# Altium PCB PCB1.PcbDoc
Units mm, origin at the board's own origin, x right, y up, seen from the top; angles counter-clockwise.
Board outline 46.35 x 40.64 mm, 2 copper layers (Top Layer, Bottom Layer); 15 components, 22 nets, 31 pads, 0 vias.
Unrouted connection lines stored in the file: 13.
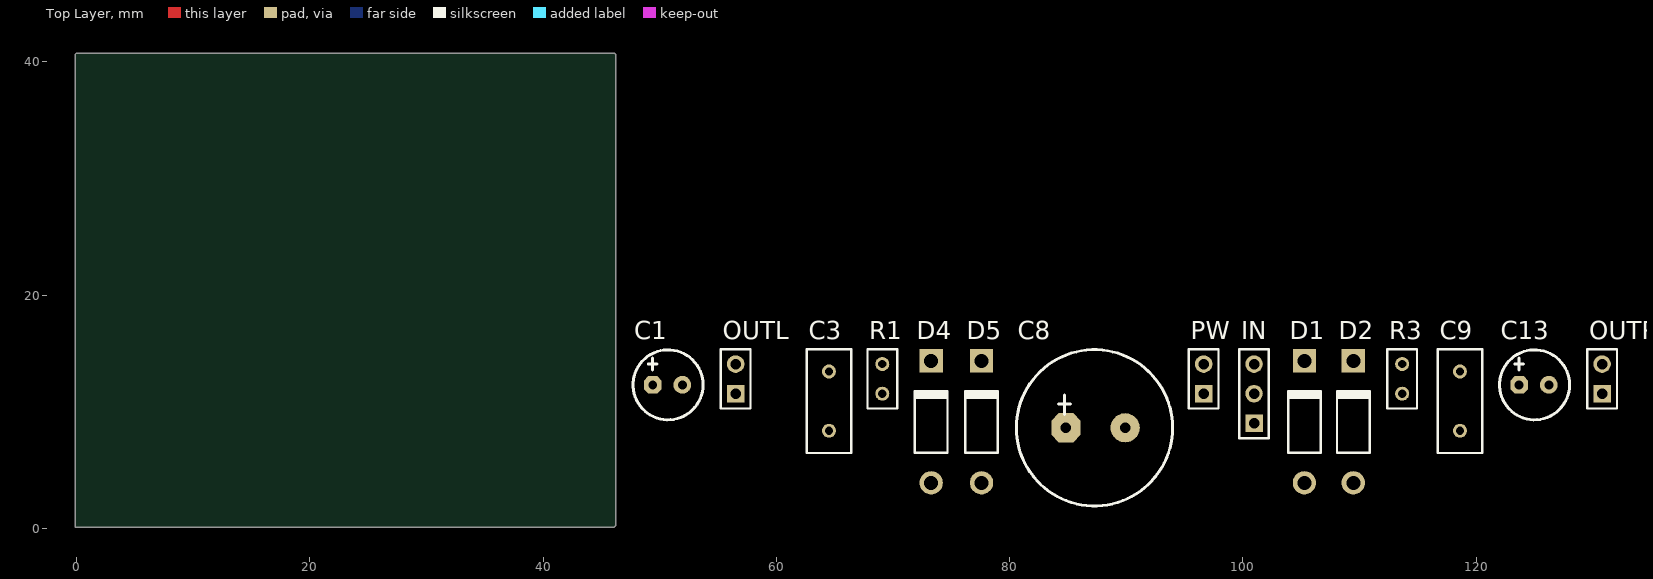
[diagram p0: Top Layer view]
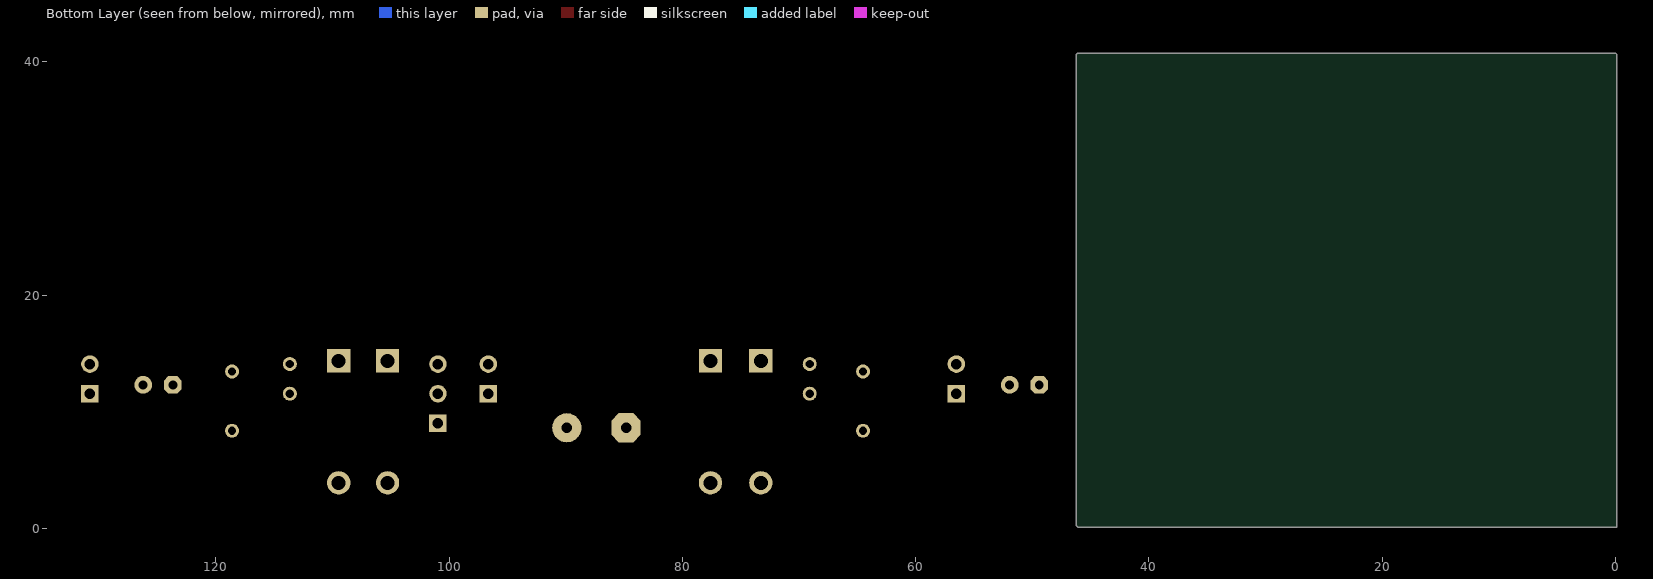
[diagram p1: Bottom Layer view, seen from below]

## Layer stack, top to bottom
Top Layer: signal copper 0.0356
Dielectric: dielectric 0.32, FR-4, Dk 4.8
Bottom Layer: signal copper 0.0356

## Board outline
-0.127,0.127 -0.127,40.64 0,40.767 46.101,40.767 46.228,40.64 46.228,0.254 46.101,0.127

## Design rules (kind name [scope] priority, off if disabled: settings)
Clearance [All] p1: gap=0.254
PolygonConnect [All] p1: connectstyle=Relief reliefconductorwidth=0.254 reliefentries=4 polygonreliefangle="90 Angle"
RoomDefinition Sheet1 [InComponentClass('Sheet1')] p1: confinementstyle=ConfineIn formatcopy=TRUE lockcomponents=FALSE outline 47.371,1.651 135.763,1.651 135.763,18.161 47.371,18.161
RoutingLayers [All] p1: top layer_v5=FALSE bottom layer_v5=TRUE
RoutingVias [All] p1: holewidth=0.711 width=1.27 viastyle="Through Hole" minholewidth=0.711 minwidth=1.27 maxholewidth=0.711 maxwidth=1.27
SilkscreenOverComponentPads [All] p1: minsilkscreentomaskgap=0.254
SolderMaskExpansion [All] p1: expansion=0.102
Width [All] p1: maxlimit=2 minlimit=1 preferedwidth=1 minimp=50.000000 maximp=50.000000 favimp=50.000000
26 further rules are at their usual default settings.

## Components (designator, comment, footprint, x,y, rotation, side; value= is the part's Value field where it differs from the comment)
C1 "470u" CF0.1-6.5 49.403,12.319 r0 top
C3 "0.22" RAD-0.2 64.516,10.922 r90 top
C8 "CF" CF0.2-13 84.836,8.636 r0 top
C9 "0.22" RAD-0.2 118.618,10.922 r90 top
C13 "470u" CF0.1-6.5 123.698,12.319 r0 top
D1 "Diode 1N4007" DIO10.46-5.3x2.8 105.283,9.144 r90 top
D2 "Diode 1N4007" DIO10.46-5.3x2.8 109.474,9.144 r90 top
D4 "Diode 1N4007" DIO10.46-5.3x2.8 73.279,9.144 r90 top
D5 "Diode 1N4007" DIO10.46-5.3x2.8 77.597,9.144 r90 top
IN "" HDR1X3 100.965,9.017 r90 top
OUTL "Header 2" HDR1X2 56.515,11.557 r90 top
OUTR "Header 2" HDR1X2 130.81,11.557 r90 top
PW "Header 2" HDR1X2 96.647,11.557 r90 top
R1 "1k" RAD-0.1 69.088,12.827 r90 top
R3 "1k" RAD-0.1 113.665,12.827 r90 top

## Footprints (in the part's own frame and the unit in brackets; to place one, negate y for a bottom-side part, rotate by r counter-clockwise, add the part's x,y. Pads: shape width x height; smd on the part's side, far side on the other; paste and mask are expansions set on the pad)
CF0.1-6.5 [mil]
  oct 60x60 hole 30: 1(0,0)
  round 60 hole 30: 2(100,0)
  silkscreen extent -66,-118 170,118
CF0.2-13 [mm]
  oct 2.5x2.5 hole 0.9: 1(0,0)
  round 2.5 hole 0.9: 2(5.08,0)
  silkscreen extent -4.26,-6.7 9.14,6.7
DIO10.46-5.3x2.8 [mm] "Diode, Axial; Body 5.2 x 2.7 mm (LxDia. max), Lead Dia. 0.86 mm (max)"
  round 2 hole 1.2: 1(-5.23,0)
  rect 2x2 hole 1.2: 2(5.23,0)
  silkscreen extent -2.65,-1.4 2.75,1.4
HDR1X2 [mm] "Connector; Header; 2 Position"
  rect 1.5x1.5 hole 0.9: 1(0,0)
  round 1.5 hole 0.9: 2(2.54,0)
  silkscreen extent -1.27,-1.27 3.81,1.27
HDR1X3 [mm] "Connector; Header; 3 Position"
  rect 1.5x1.5 hole 0.9: 1(0,0)
  round 1.5 hole 0.9: 2(2.54,0) 3(5.08,0)
  silkscreen extent -1.27,-1.27 6.35,1.27
RAD-0.1 [mm] "Radial Cap, Thru-Hole; 2 Leads; 0.1 in Pin Spacing"
  round 1.2 hole 0.7: 1(-1.27,0) 2(1.27,0)
  silkscreen extent -2.54,-1.27 2.54,1.27
RAD-0.2 [mm] "Radial Cap, Thru-Hole; 2 Leads; 0.2 in Pin Spacing"
  round 1.2 hole 0.7: 1(-2.54,0) 2(2.54,0)
  silkscreen extent -4.44,-1.91 4.44,1.91

## Part data
C1 C13: library part CF
C3 C9: library part Cap
D1 D2 D4 D5: "1 Amp General Purpose Rectifier"
IN: library part "Header 3H", "Header, 3-Pin, Right Angle"
OUTL OUTR PW: "Header, 2-Pin"
R1 R3: library part Res, "Resistor"

## Nets (pads, with @x,y where several pads share a name; then routed paths per layer and width w, separated by ;. In a path a pad name is that pad's centre, name@x,y a point inside that pad or via, vN(x,y) a via of type N, cw(c..) or ccw(c..) an arc to the next point about the centre after c; other vN are vias at no path point)
GND: C8.2 D4.1 D5.1 IN.2 OUTL.1 OUTR.1
NetC1_1: C1.1
NetC1_2: C1.2 OUTL.2
NetC3_1: C3.1
NetC3_2: C3.2
NetC4_1: R1.2
NetC5_1: 
NetC6_1: 
NetC9_1: C9.1
NetC9_2: C9.2
NetC10_1: 
NetC10_2: C13.1
NetC11_1: R3.1
NetC13_2: C13.2 OUTR.2
NetD1_1: D1.1 D4.2 PW.1
NetD2_1: D2.1 D5.2 PW.2
NetD3_2: 
NetIN_1: IN.1
NetIN_3: IN.3
NetR1_1: R1.1
NetR3_2: R3.2
VCC: C8.1 D1.2 D2.2